# Altium PCB PCB1.PcbDoc
Units mil, origin at the board's own origin, x right, y up, seen from the top; angles counter-clockwise.
Board outline 2380 x 2890 mil, 2 copper layers (Top Layer, Bottom Layer); 22 components, 42 nets, 135 pads, 0 vias.
Unrouted connection lines stored in the file: 7.
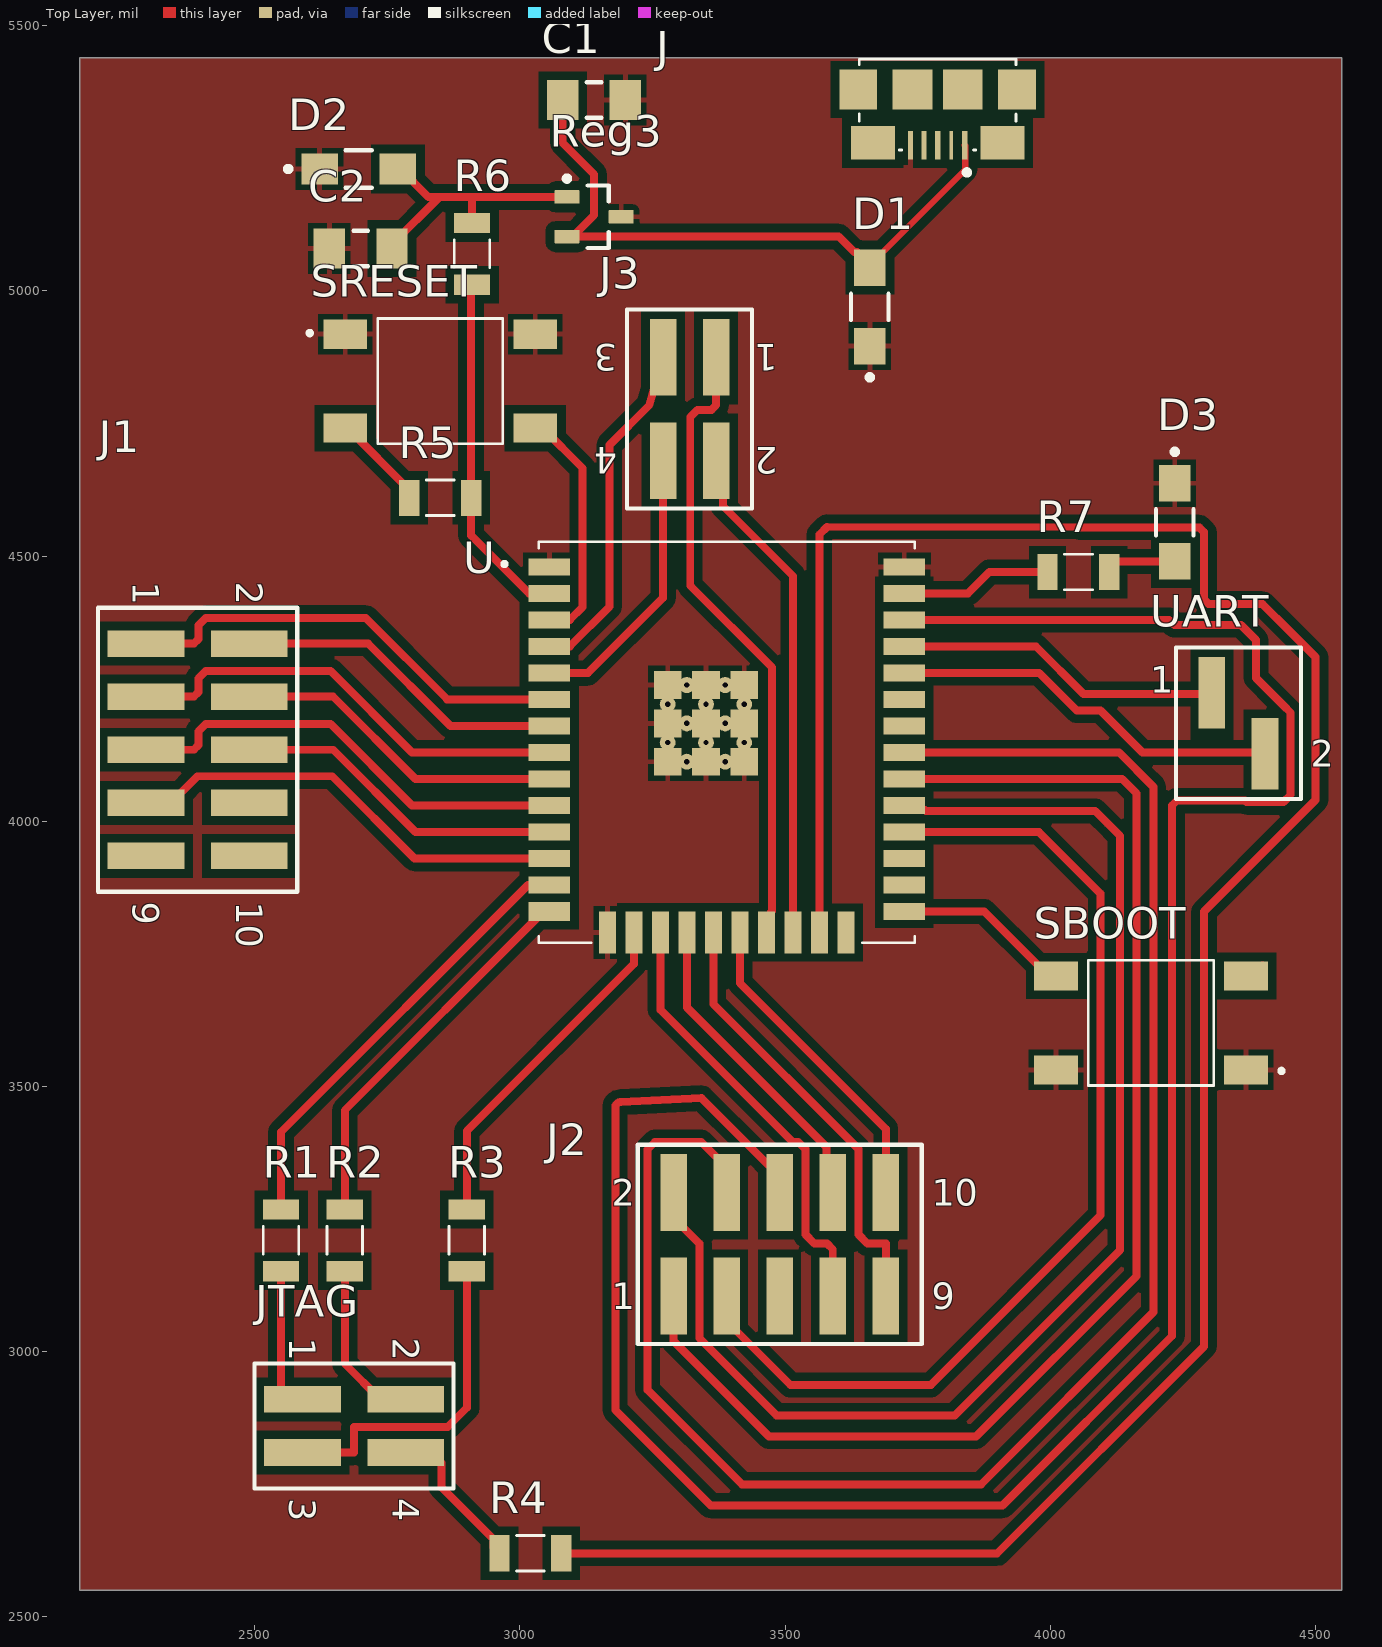
[diagram p0: Top Layer view]
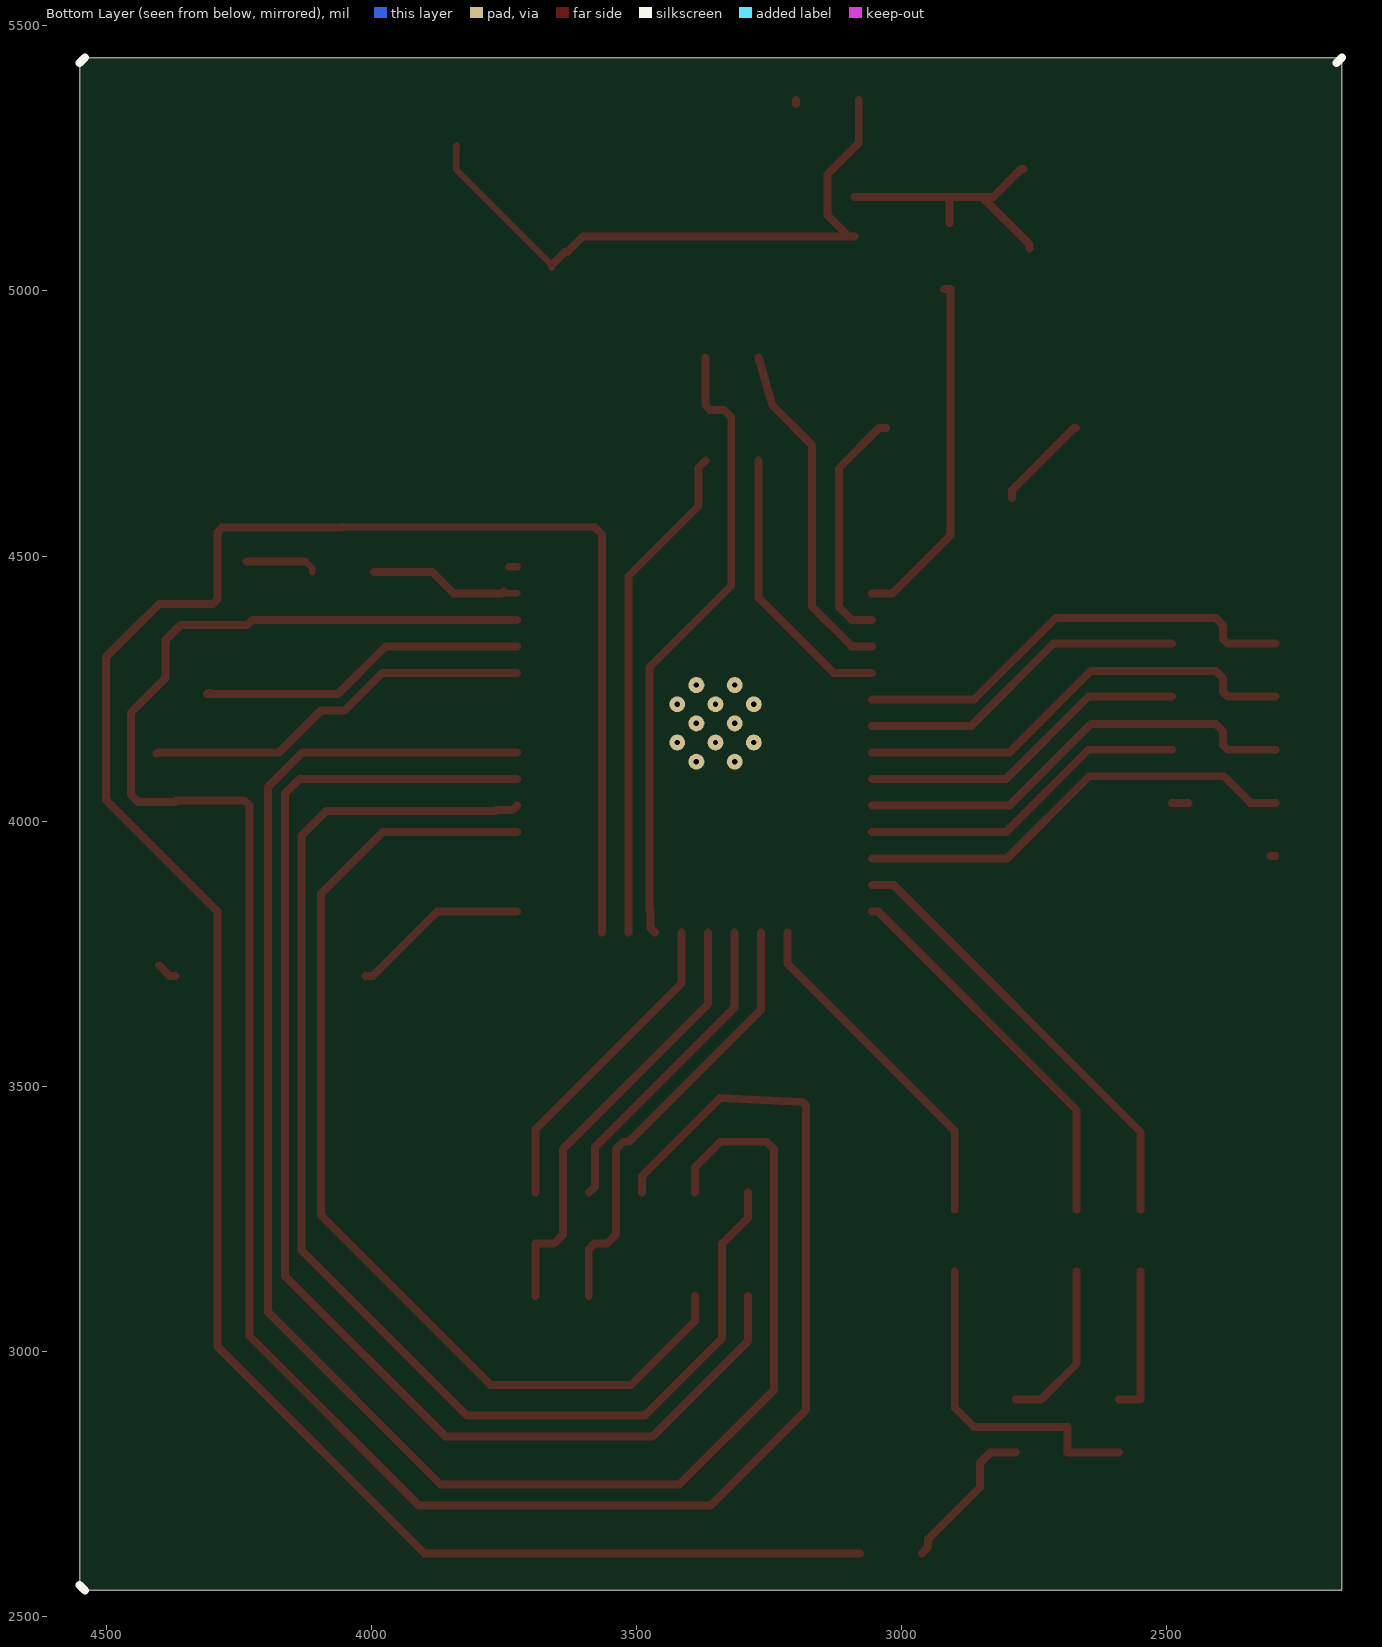
[diagram p1: Bottom Layer view, seen from below]

## Layer stack, top to bottom
Top Solder: solder mask 0.4, Solder Resist, Dk 3.5
Top Layer: signal copper 1.4
Dielectric 1: dielectric 12.6, FR-4, Dk 4.8
Bottom Layer: signal copper 1.4
Bottom Solder: solder mask 0.4, Solder Resist, Dk 3.5

## Board outline
2170,2550 4550,2550 4550,5440 2170,5440

## Design rules (kind name [scope] priority, off if disabled: settings)
Clearance [All] p1: gap=16 ignorepadtopadclearanceinfootprint=FALSE
PlaneConnect [All] p1: planeconnectstyle=Relief reliefexpansion=20 reliefentries=4 reliefconductorwidth=16 reliefairgap=16
PolygonConnect [All] p1: connectstyle=Relief reliefconductorwidth=10 reliefentries=4 polygonreliefangle="90 Angle" airgapwidth=10
RoutingVias [All] p1: holewidth=28 width=50 viastyle="Through Hole" minholewidth=28 minwidth=50 maxholewidth=28 maxwidth=50
SolderMaskExpansion [All] p1: expansion=4 istentingtop=FALSE
Width [All] p1: maxlimit=100 minlimit=10 preferedwidth=14 toplayer_minwidth=12 bottomlayer_maxwidth=10 bottomlayer_prefwidth=10 minimp=50.000000 maximp=50.000000 favimp=50.000000
29 further rules are at their usual default settings.

## Components (designator, comment, footprint, x,y, rotation, side; value= is the part's Value field where it differs from the comment)
C1 "C1206C104K5RACTU" KEMT-1206-2_M 3140,5360 r180 top
C2 "C1206C104K5RACTU" KEMT-1206-2_M 2700,5080 r0 top
D1 "APTD3216CGCK" FP-APTD3216CGCK-MFG 3660,4970 r90 top
D2 "APTD3216CGCK" FP-APTD3216CGCK-MFG 2696.18,5230 r0 top
D3 "APTD3216CGCK" FP-APTD3216CGCK-MFG 4235,4563.82 r270 top
J "10118192-0001LF" AMPHENOL_10118192-0001LF 3787.76,5274.68 r180 top
J1 "SAMTEC-TSM-105-01-X-DV" SAMTEC-TSM-105-01-X-DV 2392.52,4135 r270 top
J2 "SAMTEC-TSM-105-01-X-DV" SAMTEC-TSM-105-01-X-DV 3490,3202.48 r0 top
J3 "" SAMTEC-TSM-102-01-X-DV 3320,4777.48 r180 top
JTAG "" SAMTEC-TSM-102-01-X-DV 2687.48,2860 r270 top
R1 "100R" RESC3116X65N 2550,3210 r270 top
R2 "100R" RESC3116X65N 2670,3210 r270 top
R3 "100R" RESC3116X65N 2900,3210 r270 top
R4 "100R" RESC3116X65N 3020,2620 r180 top
R5 "10k" RESC3116X65N 2850,4610 r0 top
R6 "0R" RESC3116X65N 2910,5070 r270 top
R7 "200" RESC3116X65N 4053.27,4470 r180 top
Reg3 "LM3480IM3-3.3/NOPB" DBZ0003A_M 3140,5140 r0 top
SBOOT "4-1437565-9" SW_4-1437565-9 4190,3620 r180 top
SRESET "4-1437565-9" SW_4-1437565-9 2850,4830 r0 top
U "ESP32-WROOM-32U" XCVR_ESP32-WROOM-32U 3390.35,4148.9 r0 top
UART "" SAMTEC-TSM-102-01-X-SV 4350,4180 r0 top

## Footprints (in the part's own frame and the unit in brackets; to place one, negate y for a bottom-side part, rotate by r counter-clockwise, add the part's x,y. Pads: shape width x height; smd on the part's side, far side on the other; paste and mask are expansions set on the pad)
AMPHENOL_10118192-0001LF [mm]
  rect 0.254x1.35 smd mask+0: 1(-1.3,0) 3(0,0)
  rect 0.178x1.35 smd mask+0: 2(-0.65,0)
  rect 0.229x1.35 smd mask+0: 4(0.65,0)
  rect 0.229x1.35 smd paste+0 mask+0: 5(1.3,0)
  rect 2.1x1.6 smd: SH1(-3.1,-0.125) SH2(3.1,-0.125)
  rect 1.8x1.9 smd: SH3(-3.8,-2.675) SH6(3.8,-2.675)
  rect 1.9x1.9 smd: SH4(-1.2,-2.675) SH5(1.2,-2.675)
  silkscreen extent -3.75,-4.13 3.75,1.4
DBZ0003A_M [mm] "SOT23, 3-Leads, Body 3.04x1.4mm, Pitch 0.95mm, IPC Low Density"
  rrect15% 1.2x0.65 smd: 1(-1.3,0.95) 2(-1.3,-0.95) 3(1.3,0)
  silkscreen extent -1.42,-1.5 0.7,1.95, body extent -1.26,-1.46 1.26,1.46, height 0.96
FP-APTD3216CGCK-MFG [mm]
  rect 1.75x1.5 smd paste+0 mask+0: 1(-1.875,0) 2(1.875,0)
  silkscreen extent -3.5,-0.9 0.62,0.9, body extent -2.85,-1 2.85,1, height 0.25
KEMT-1206-2_M [mm] "SMD, 2-Leads, Body 3.4x1.8mm, IPC Low Density"
  rect 1.5x1.9 smd: 1(-1.5,0) 2(1.5,0)
  silkscreen extent -0.35,-0.85 0.35,0.85, body extent -1.7,-0.9 1.7,0.9, height 0.88
RESC3116X65N [mm]
  rect 0.97x1.73 smd: 1(-1.48,0) 2(1.48,0)
  silkscreen extent -0.67,-0.85 0.67,0.85
SAMTEC-TSM-102-01-X-DV [mm]
  rect 1.27x3.68 smd mask+0: 1(-1.27,-2.476) 2(-1.27,2.476) 3(1.27,-2.476) 4(1.27,2.476)
  silkscreen extent -2.99,-4.77 2.99,4.77
SAMTEC-TSM-102-01-X-SV [mil]
  rect 50x135.04 smd mask+0: 1(-45,62.48) 2(55,-52.48)
  silkscreen extent -113,-138 123,148
SAMTEC-TSM-105-01-X-DV [mm]
  rect 1.27x3.68 smd mask+0: 1(-5.08,-2.476) 2(-5.08,2.476) 3(-2.54,-2.476) 4(-2.54,2.476) 5(0,-2.476) 6(0,2.476) 7(2.54,-2.476) 8(2.54,2.476) 9(5.08,-2.476) 10(5.08,2.476)
  silkscreen extent -6.8,-4.77 6.8,4.77
SW_4-1437565-9 [mm]
  rect 2.1x1.4 smd: 1(-4.55,2.25) 2(4.55,2.25) 3(-4.55,-2.25) 4(4.55,-2.25)
  silkscreen extent -6.35,-3 3,3
XCVR_ESP32-WROOM-32U [mm]
  rect 2x0.813 smd: 1(-8.5,8.41) 2(-8.5,7.14) 3(-8.5,5.87) 4(-8.5,4.6) 5(-8.5,3.33) 6(-8.5,2.06) 7(-8.5,0.79) 8(-8.5,-0.48) 9(-8.5,-1.75) 10(-8.5,-3.02) 11(-8.5,-4.29) 12(-8.5,-5.56) 13(-8.5,-6.83) 25(8.5,-8.1) 26(8.5,-6.83) 27(8.5,-5.56) 28(8.5,-4.29) 29(8.5,-3.02) 30(8.5,-1.75) 31(8.5,-0.48) 32(8.5,0.79) 33(8.5,2.06) 34(8.5,3.33) 35(8.5,4.6) 36(8.5,5.87) 37(8.5,7.14) 38(8.5,8.41)
  rect 2x0.9 smd: 14(-8.5,-8.1)
  rect 0.813x2 smd: 15(-5.715,-9.1) 16(-4.445,-9.1) 17(-3.175,-9.1) 18(-1.905,-9.1) 19(-0.635,-9.1) 20(0.635,-9.1) 21(1.905,-9.1) 22(3.175,-9.1) 23(4.445,-9.1) 24(5.715,-9.1)
  rect 1.33x1.33 smd: G.1(0.835,2.745) G.2(-1,2.745) G.4(-2.835,2.745) G.5(0.835,0.91) G.6(-1,0.91) G.7(-2.835,0.91) G.8(0.835,-0.925) G.9(-1,-0.925) G.10(-2.835,-0.925)
  round 0.762 hole 0.254: G.11(-0.083,2.745) G.12(-1.918,2.745) G.13(0.835,1.827) G.14(-1,1.827) G.15(-2.835,1.827) G.16(-0.083,0.91) G.17(-1.918,0.91) G.18(0.835,-0.008) G.19(-1,-0.008) G.20(-2.835,-0.008) G.21(-0.083,-0.925) G.22(-1.918,-0.925)
  silkscreen extent -10.75,-9.6 9,9.6

## Part data
C1 C2: library part CMP-1037-04202-2, "CAP, Ceramic, 0.1 uF, +/- 10%, 50 V, -55 to 125 degC, 1206 (3216 Metric), RoHS, Tape and Reel", Capacitance=0.1µF, Capacitance Tolerance=±10%, Capacitor Case Style=1206[3216Metric], Dielectric Characteristic=X7R, Manufacturer=Kemet, Operating Temperature Max=125degC, Operating Temperature Min=-55degC, Package Description="2-Leads SMD, Body 3.2 x 1.6 mm", Package Reference=1206-2, Voltage Rating=50V, Datasheet URL=https://datasheet.ciiva.com/6125/1725438-6125494.pdf, Datasheet Version=Jul-13, Manufacturer URL=http://www.kemet.com/, Packaging=Tape&Reel, Product Range=KEMET-CSeries, SVHC=ToBeAdvised
D1 D2 D3: library part CMP-2000-05792-2, "LED GREEN CLEAR 2SMD", Case Code (Imperial)=1206, Case Code (Metric)=3216, Color=Green, Forward Current=20mA, Forward Voltage=2.1V, Lens Color=Clear, Max Operating Temperature=85°C, Min Operating Temperature=-40°C, Package Quantity=2000, Case/Package=1206, Dominant Wavelength=570nm, Height=1.8mm, Illumination Color=Green, Lead Free="Lead Free", Length=3.2mm, Lens Style=Clear, Luminous Intensity=300mcd, Mount="Surface Mount", Number of LEDs=1, Number of Pins=2, Packaging="Tape and Reel", Test Current=20mA, Viewing Angle=50°, Width=1.6mm
J: "USB - micro B USB 2.0 Receptacle Connector 5 Position Surface Mount, Right Angle", Package=None, Availability=Unavailable, MF="Amphenol ICC", MP=10118192-0001LF, Price=None, SnapEDA_Link=https://www.snapeda.com/parts/10118192-0001LF/Amphenol%20FCI/view-part/2897676/?ref=snap
J1 J2: "TSM Series .100 Surface Mount Terminal Strip", Package=None, Digi-Key_Part_Number=TSM-105-01-F-DV-001-ND, Digi-Key_Purchase_URL=https://www.digikey.com/product-detail/en/samtec-inc/TSM-105-01-F-DV-001/TSM-105-01-F-DV-001-ND/7637717?utm_source=snapeda&utm_medium=aggregator&utm_campaign=symbol, MF="Samtec Inc.", MP=TSM-105-01-F-DV, SnapEDA_Link=https://www.snapeda.com/parts/TSM-105-01-F-DV/Samtec%20Inc./view-part/2802977/?ref=snap
J3 JTAG: library part SAMTEC-TSM-102-01-X-DV, "TSM Series .100 Surface Mount Terminal Strip", Package=None, Digi-Key_Part_Number=TSM-102-01-F-DV-ND, Digi-Key_Purchase_URL=https://www.digikey.com/product-detail/en/samtec-inc/TSM-102-01-F-DV/TSM-102-01-F-DV-ND/7623428?utm_source=snapeda&utm_medium=aggregator&utm_campaign=symbol, MF=Samtec, MP=TSM-102-01-F-DV, SnapEDA_Link=https://www.snapeda.com/parts/TSM-102-01-F-DV/Samtec%20Inc./view-part/2805976/?ref=snap
R1 R2 R3 R4 R5 R6 R7: library part RC1206JR-0713RL, "13 Ohms Â±5% 0.25W, 1/4W Chip Resistor 1206 _3216 Metric_ Moisture Resistant Thick Film", Package="3116 Yageo", Availability=Unavailable, MF=Yageo, MP=RC1206JR-0713RL, Price=None, SnapEDA_Link=https://www.snapeda.com/parts/RC1206JR-0713RL/Yageo/view-part/105893/?ref=snap
Reg3: library part CMP-0062-02202-3, "100 mA, Quasi Low-Dropout Linear Voltage Regulator, 3-pin SOT-23, Pb-Free", Manufacturer="Texas Instruments", PackageTopMarking=L0A*XTT, PowerWise=N, ComponentLink1Description="Datasheet URL", ComponentLink1URL=http://www.ti.com/general/docs/lit/getliterature.tsp?genericPartNumber=LM3480&fileType=pdf, CompType="LDO IC", PackageDescription="Molded SOT-23, .115 x .051 x .037in Body, 3 Lead, .075 in Pitch", PackageReference=DBZ0003A, PinCount=3, RoHS=Y
SBOOT SRESET: "Tactile Switch SPST-NO Top Actuated Surface Mount", Contact_Current_Rating="50 mA", Package=None, Availability=Warning, Configuration_Pole-Throw="Single Pole - Single Throw", EU_RoHS_Compliance=Compliant, MF="TE Connectivity", MP=4-1437565-9, Price=None, Purchase-URL=https://pricing.snapeda.com/search/part/4-1437565-9/?ref=eda, SnapEDA_Link=https://www.snapeda.com/parts/4-1437565-9/TE%20Connectivity%20ALCOSWITCH%20Switches/view-part/304397/?ref=snap
U: "Bluetooth, WiFi 802.11b/g/n, Bluetooth v4.2 +EDR, Class 1, 2 and 3 Transceiver Module 2.4GHz ~ 2.5GHz Antenna Not Included, U.FL Surface Mount", Package="Module Espressif Systems", Availability=Unavailable, DigiKey-Purchase-URL=https://snapeda.com/shop?store=DigiKey&id=2472476, MF="Espressif Systems", MP=ESP32-WROOM-32U, Price=None, SnapEDA_Link=https://www.snapeda.com/parts/ESP32-WROOM-32U/Espressif%20Systems/view-part/2472476/?ref=snap
UART: library part SAMTEC-TSM-102-01-X-SV, "Steckverbinder-Header-OberflÃ¤chenmontage 2 Position 2,54 mm (0,100 )", Package=None, Digi-Key_Part_Number=SAM14779CT-ND, MF=Samtec, MP=TSM-102-01-T-SV-TR, SnapEDA_Link=https://www.snapeda.com/parts/TSM-102-01-T-SV-TR/Samtec%20Inc./view-part/2803555/?ref=snap, Toby_UK-Purchase-URL=https://snapeda.com/shop?store=Toby+UK&id=2803555

## Nets (pads, with @x,y where several pads share a name; then routed paths per layer and width w, separated by ;. In a path a pad name is that pad's centre, name@x,y a point inside that pad or via, vN(x,y) a via of type N, cw(c..) or ccw(c..) an arc to the next point about the centre after c; other vN are vias at no path point)
GND: C1.1 C2.1 D1.1 D2.1 D3.1 J.5 Reg3.3 SBOOT.1 SBOOT.2 SRESET.1 SRESET.2 U.1 U.15 U.38 U.G.1 U.G.2 U.G.4 U.G.5 U.G.6 U.G.7 U.G.8 U.G.9 U.G.10 U.G.11 U.G.12 U.G.13 U.G.14 U.G.15 U.G.16 U.G.17 U.G.18 U.G.19 U.G.20 U.G.21 U.G.22 | length 22.9
  Top Layer w15: C1.1@3199.05,5352.13 C1.1 ; U.38 U.38@3740,4480
NetC1_2: C1.2 D1.2 J.1 Reg3.2 | length 1197.9
  Top Layer w12: D1.2 3660,5048.74 3840,5228.74 3840,5250 3839.94,5250.06 3839.94,5273.68 J.1
  Top Layer w15: C1.2 3080.94,5279.06 3140,5220 3140,5142.95 Reg3.2@3099.65,5102.6 ; Reg3.2 Reg3.2@3099.65,5102.6 ; D1.2@3660,5048.74 3635.47,5073.27 3630.55,5073.27 3601.22,5102.6 Reg3.2@3099.65,5102.6
NetC2_2: C2.2 D2.2 R6.1 Reg3.1 | length 524.2
  Top Layer w15: C2.2 2759.06,5087.87 2848.58,5177.4 ; D2.2 2774.92,5230 2827.52,5177.4 2848.58,5177.4 ; R6.1 2910,5177.4 ; Reg3.1 2910,5177.4 ; 2848.58,5177.4 2910,5177.4
NetD3_2: D3.2 R7.1 | length 135.8
  Top Layer w12: R7.1 4111.54,4476.91 R7.1@4124.63,4490
  Top Layer w15: R7.1@4124.63,4490 D3.2
NetJ1_1: J1.1 U.6 | length 859.5
  Top Layer w15: J1.1 2385.27,4335 2394.06,4343.79 2394.06,4369.73 2407.83,4383.5 2709.56,4383.5 2863.06,4230 U.6
NetJ1_2: J1.2 U.7 | length 629.9
  Top Layer w15: J1.2 2714.22,4335 2869.22,4180 U.7
NetJ1_3: J1.3 U.8 | length 859.5
  Top Layer w15: J1.3 2385.27,4235 2394.06,4243.79 2394.06,4269.73 2407.83,4283.5 2643.47,4283.5 2796.97,4130 U.8
NetJ1_4: J1.4 U.9 | length 629.9
  Top Layer w15: J1.4 2648.13,4235 2803.13,4080 U.9
NetJ1_5: J1.5 U.10 | length 859.5
  Top Layer w15: J1.5 2385.27,4135 2394.06,4143.79 2394.06,4169.73 2407.83,4183.5 2643.47,4183.5 2796.97,4030 U.10
NetJ1_6: J1.6 U.11 | length 629.9
  Top Layer w15: J1.6 2648.13,4135 2803.13,3980 U.11
NetJ1_7: J1.7 U.12 | length 845.6
  Top Layer w15: J1.7 2342.48,4035 2392.48,4085 2646.31,4085 2801.31,3930 U.12
NetJ1_8: J1.8 U.24 | length 30.7
  Top Layer w15: J1.8@2459.33,4035 J1.8
NetJ1_9: J1.9 U.26 | length 10
  Top Layer w15: J1.9 J1.9@2305,3935
NetJ1_10: J1.10 U.27
NetJ2_1: J2.1 U.30 | length 2517
  Top Layer w15: J2.1 3290,3020 3470,2840 3860,2840 4163,3143 4163,4052.64 4135.64,4080 U.30
NetJ2_2: J2.2 U.29 | length 2488.5
  Top Layer w15: J2.2 3290,3252.52 3338.5,3204.02 3338.5,3025.83 3484.33,2880 3820,2880 4132,3192 4132,3972.25 4108.04,3996.21 4084.75,4019.5 3765.66,4019.5 3763.66,4021.5 3733.5,4021.5 U.29
NetJ2_3: J2.3 U.28 | length 1959
  Top Layer w15: J2.3 3390,3057.56 3510,2937.56 3775.13,2937.56 4095,3257.43 4095,3863.6 3978.6,3980 U.28
NetJ2_4: J2.4 U.31 | length 3325.5
  Top Layer w15: J2.4 3390,3347.4 3341.5,3395.9 3255.27,3395.9 3241,3381.64 3241,2927.79 3418.79,2750 3870,2750 4195,3075 4195,4065 4130,4130 U.31
NetJ2_5: J2.5 U.33
NetJ2_6: J2.6 U.36 | length 4467.9
  Top Layer w15: J2.6 3490,3330.64 3342.28,3478.36 3189.74,3470.5 3185.65,3470.29 3180,3464.64 3180,2890 3360,2710 3910,2710 4230,3030 4230,4030.21 4238.79,4039 4367.77,4039 4370.27,4036.5 4439.73,4036.5 4453.5,4050.27 4453.5,4204.77 4439.73,4218.54 4388.01,4270.26 4388.01,4341.99 4360,4370 4234.14,4370 4224.14,4380 U.36
NetJ2_7: J2.7 U.17 | length 840.3
  Top Layer w15: U.17 3265.35,3644.67 3514.13,3395.9 3524.73,3395.9 3538.5,3382.14 3538.5,3220.78 3555.27,3204.02 3579.19,3204.02 3590,3193.21 J2.7
NetJ2_8: J2.8 U.18 | length 604.4
  Top Layer w15: U.18 3315.35,3649.12 3578.36,3386.11 3578.36,3311.6 J2.8
NetJ2_9: J2.9 U.19 | length 840.4
  Top Layer w15: U.19 3365.35,3655.28 3638.5,3382.14 3638.5,3220.79 3655.27,3204.02 3690,3204.02 J2.9
NetJ2_10: J2.10 U.20 | length 604.4
  Top Layer w15: U.20 3415.35,3694.8 3690,3420.15 J2.10
NetJ3_1: J3.1 U.21 | length 1187.9
  Top Layer w14: 3321.5,4444.29 3321.5,4762.18
  Top Layer w15: 3321.5,4444.29 3475.85,4289.94 3475.85,3831.29 3473.85,3829.29 3473.85,3799.13 U.21 ; 3321.5,4762.18 3335.27,4775.94 3361.21,4775.94 3370,4784.73 J3.1
NetJ3_2: J3.2 U.22 | length 949.6
  Top Layer w15: J3.2 3383.38,4666.62 3383.38,4594.12 3515.35,4462.15 U.22
NetJ3_3: J3.3 U.4 | length 649.2
  Top Layer w15: U.4 3094.31,4330 3169,4404.69 3169,4709.68 3244.05,4784.73 J3.3
NetJ3_4: J3.4 U.5 | length 531.4
  Top Layer w15: U.5 3128.49,4280 3270,4421.51 J3.4
NetJTAG_1: JTAG.1 R1.2 | length 281.7
  Top Layer w15: R1.2 2550,2910 JTAG.1
NetJTAG_2: JTAG.2 R2.2 | length 317.1
  Top Layer w15: R2.2 2670,2977.52 2737.52,2910 JTAG.2
NetJTAG_3: JTAG.3 R3.2 | length 630.7
  Top Layer w15: JTAG.3 2687,2810 2687,2858.5 2864.14,2858.5 2900,2894.36 R3.2
NetJTAG_4: JTAG.4 R4.2 | length 291
  Top Layer w15: JTAG.4 2832.4,2810 2852.4,2790 2852.4,2744.29 2950,2646.69 2950,2631.73 R4.2
NetR1_1: R1.1 U.13 | length 844.8
  Top Layer w15: R1.1 2550,3414.61 3015.39,3880 U.13
NetR2_1: R2.1 U.14 | length 727.8
  Top Layer w15: R2.1 2670,3455.09 3044.91,3830 U.14
NetR3_1: R3.1 U.16 | length 653
  Top Layer w15: R3.1 2900,3416.03 3215.35,3731.38 U.16
NetR4_1: R4.1 U.23 | length 4626.8
  Top Layer w14: 3579.14,4555 4055,4555
  Top Layer w15: R4.1 3900,2620 4290,3010 4290,3830 4500,4040 4500,4310 4451.03,4358.97 4400,4410 4298.79,4410 4290,4418.79 4290,4545.27 4281.21,4554.06 4055.94,4554.06 4055,4555 ; U.23 3565.35,4541.21 3579.14,4555
NetR5_1: R5.1 SRESET.3 SRESET.4 U.3 | length 639.3
  Top Layer w15: SRESET.3 2675.28,4741.42 2791.73,4624.96 R5.1 ; SRESET.4 3042.91,4741.42 3118.58,4665.75 3118.58,4404.27 3094.31,4380 U.3
NetR5_2: R5.2 R6.2 U.2 | length 668.9
  Top Layer w15: R6.2@2920,5003.46 2908.27,5003.46 R5.2 2908.27,4538.84 3017.1,4430 U.2
NetR7_2: R7.2 U.37 | length 290.7
  Top Layer w12: U.37 3745,4430 3750,4435 U.37@3755,4430
  Top Layer w15: U.37@3755,4430 3845.14,4430 3885.14,4470 R7.2
NetSBOOT_3: SBOOT.3 SBOOT.4 U.25 | length 375.3
  Top Layer w15: U.25 3875.67,3830 3997.09,3708.58 SBOOT.4 ; SBOOT.3 4379.94,3708.58 SBOOT.3@4400,3728.64
NetU_34: U.34 UART.2 | length 743.2
  Top Layer w15: U.34 3979.09,4280 4050.09,4209 4094.84,4209 4173.82,4130.02 4402.5,4130.02 UART.2
NetU_35: U.35 UART.1 | length 628.3
  Top Layer w15: U.35 3972.93,4330 4062.93,4240 4310,4240 4307.52,4242.48 UART.1
pads on no net: J.2 J.3 J.4 J.SH1 J.SH2 J.SH3 J.SH4 J.SH5 J.SH6 U.32

## Polygon pours and split planes (outlines as drawn)
GND on Top Layer "GND" (solid, pour order 0): 2170,5440 2170,2550 4550,2550 4550,5440

## Silkscreen, mask and mechanical layers (free items; w line width, h text height)
Bottom Overlay:
  lines w15: 2170,5440 2180,5430 ; 4540,2550 4550,2560 ; 4540,5440 4550,5430

## Text inside footprints (layer, text, board x,y; h text height)
J: Mechanical 13 "PCB Edge" at 3582.84,5428.37 h32.03 r180
J1: Top Overlay "1" at 2270,4451.38 h50 r270; Top Overlay "2" at 2465.04,4451.38 h50 r270; Top Overlay "9" at 2270,3848.5 h50 r270; Top Overlay "10" at 2465.04,3848.5 h50 r270; Mechanical 13 "2" at 2465.04,4451.38 h50 r270; Mechanical 13 "1" at 2270,4451.38 h50 r270; Mechanical 13 "2.540" at 2650,4438.5 h10 r270; Mechanical 13 "10.160" at 2687.52,4166.5 h10 r270; Mechanical 13 "12.700" at 2637.52,4166.5 h10 r270; Mechanical 13 "3.683" at 2485.04,3880.98 h10 r270; Mechanical 13 "9" at 2270,3848.5 h50 r270; Mechanical 13 "10" at 2465.04,3848.5 h50 r270; Mechanical 13 "1.270" at 2572.52,3855.98 h10 r270
J2: Top Overlay "1" at 3173.62,3079.96 h50; Top Overlay "2" at 3173.62,3275 h50; Top Overlay "9" at 3776.5,3079.96 h50; Top Overlay "10" at 3776.5,3275 h50; Mechanical 13 "4.953" at 3036.5,3197.48 h10; Mechanical 13 "5.080" at 2969.02,3197.48 h10; Mechanical 13 "1" at 3173.62,3079.96 h50; Mechanical 13 "2" at 3173.62,3275 h50; Mechanical 13 "2.540" at 3186.5,3459.96 h10; Mechanical 13 "10.160" at 3458.5,3497.48 h10; Mechanical 13 "12.700" at 3458.5,3447.48 h10; Mechanical 13 "3.683" at 3744.02,3295 h10; Mechanical 13 "9" at 3776.5,3079.96 h50; Mechanical 13 "10" at 3776.5,3275 h50; Mechanical 13 "1.270" at 3769.02,3382.48 h10
J3: Top Overlay "4" at 3183.5,4704.96 h50 r180; Top Overlay "3" at 3183.5,4900 h50 r180; Top Overlay "2" at 3486.38,4704.96 h50 r180; Top Overlay "1" at 3486.38,4900 h50 r180; Mechanical 13 "3" at 3183.5,4900 h50 r180; Mechanical 13 "2" at 3486.38,4704.96 h50 r180; Mechanical 13 "1" at 3486.38,4900 h50 r180
JTAG: Top Overlay "4" at 2760,2723.5 h50 r270; Top Overlay "3" at 2564.96,2723.5 h50 r270; Top Overlay "2" at 2760,3026.38 h50 r270; Top Overlay "1" at 2564.96,3026.38 h50 r270; Mechanical 13 "3" at 2564.96,2723.5 h50 r270; Mechanical 13 "2" at 2760,3026.38 h50 r270; Mechanical 13 "1" at 2564.96,3026.38 h50 r270
UART: Top Overlay "1" at 4188.62,4242.48 h50; Top Overlay "2" at 4491.5,4102.48 h50; Mechanical 13 "1" at 4188.62,4242.48 h50